# EAGLE board laser (EAGLE 9.3.0)
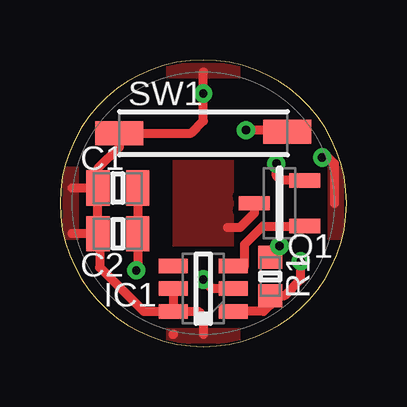
[diagram p0: board, top side]
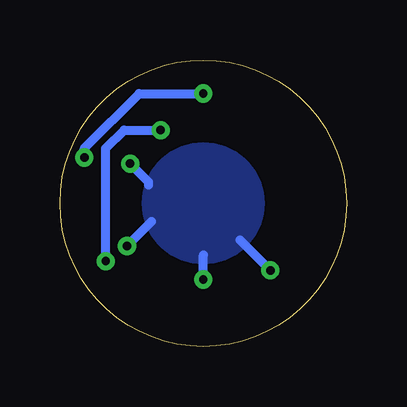
[diagram p1: board, bottom side, seen from below]

Size 11.94 x 11.94 mm. Coordinates in mm from the lower left corner, seen from the top.
Outline: 0,5.97 arc90 5.97,0 arc90 11.94,5.97 arc90 5.97,11.94 arc90 0,5.97
Copper layers (1*16): Top 0.035mm / dielectric 1.5mm / Bottom 0.035mm
Design rules "default": minimum track width 15mil, minimum drill 0.35mm, track to track 10mil, track to pad 10mil, pad to pad 10mil, via to via 10mil, smd to smd 0mil, copper to edge 0mil, drill to drill 6mil, minimum pad ring 10mil, minimum via ring 8mil, stop-mask expansion 4mil, vias tented up to drill 25mil, thermal gap 10mil

## Footprints (pad centres in the part's own frame; a part is rotated, then mirrored left to right if it is on the bottom)
0805 = smd 0.97 x 1.47: 1 -0.83,0; 2 0.83,0
SOT23-6 = smd 1.2 x 0.6: 1 -1.25,0.95; 2 -1.25,0; 3 -1.25,-0.95; 4 1.25,-0.95; 5 1.25,0; 6 1.25,0.95
SOT23-3 = smd 1.3 x 0.6: 1 -1.05,0.95; 2 -1.05,-0.95; 3 1.05,0
0603 = smd 0.95 x 1: 1 -0.8,0; 2 0.8,0
REED-7MM-SMD = smd 2 x 1: P$1 -3.5,0; P$2 3.5,0.05

## Placement (x,y rotation side)
C1  [0805]  2.41,6.6 180 top
C2  [0805]  2.41,4.7 180 top
IC1  [SOT23-6]  5.97,2.41 180 top
Q1  [SOT23-3]  9.14,5.97 180 top
R1  [0603]  8.76,2.92 270 top
SW1  [REED-7MM-SMD]  5.97,8.89 0 top

## Library data of the parts
C1 C2 IC1 Q1 R1 SW1 = SamacSys_Parts

## Nets
GND: C1.1 C2.1 IC1.2 Q1.2 R1.1
N$1: IC1.3 Q1.1
N$2: IC1.1 R1.2 SW1.P$2
N$3: Q1.3
VCC: C1.2 C2.2 IC1.5 IC1.6 SW1.P$1

## Tracks (layer width: path | path; a pad name or v marks a point on that pad's centre or on a via)
GND  (via drill 0.35)
  Top 0.381: v9.14,4.19 8.76,3.81 R1.1 | C1.1 C2.1 3.24,3.24 v3.17,3.17 | Q1.2 9.21,6.92 9.02,7.11 v9.02,7.62 | IC1.2 6.35,2.41 v5.97,2.79
  Bottom 0.381: v3.17,3.17 4.45,4.45 | v5.97,2.79 5.97,3.81 | v9.02,7.62 8.26,6.86 8.26,6.73 | v9.14,4.19 8.13,5.21
  pour Bottom: 3.43,5.97 arc90 5.97,3.43 arc90 8.51,5.97 arc90 5.97,8.51 arc90
N$1
  Top 0.381: IC1.3 7.69,3.36 7.69,4.25 8.46,5.02 Q1.1
N$2  (via drill 0.35)
  Top 0.381: IC1.1 8.49,1.46 8.76,1.74 R1.2 9.36,2.12 10.03,2.79 v10.03,3.56 | SW1.P$2 9.39,9.02 v7.75,9.02
  Bottom 0.381: v10.03,3.56 10.03,8.26 9.27,9.02 v7.75,9.02
N$3
  Top 0.381: Q1.3 8.09,5.55 7.49,4.95 6.99,4.95
  pour Top: 7.24,7.75 4.7,7.75 4.7,4.19 7.24,4.19
VCC  (via drill 0.35)
  Top 0.381: IC1.5 IC1.6 | C2.2 1.65,4.63 1.65,3.3 3.49,1.46 IC1.6 | C2.2 C1.2 | C1.2 1.58,7.42 2.47,8.31 SW1.P$1 5.46,8.89 5.97,9.4 v5.97,10.54 5.97,11.43 | C1.2 0.51,6.6 | C2.2 0.51,4.7 | 4.72,0.53 4.7,0.51 | IC1.6 5.78,1.46 5.97,1.27 5.97,0.51 | v10.92,7.87 11.18,7.87 11.43,7.62 11.43,5.97
  Bottom 0.381: v10.92,7.87 10.92,8.26 8.64,10.54 v5.97,10.54
  pour Top: 5.08,0.13 4.45,0.25 4.45,0.76 7.49,0.76 7.49,0.25 6.86,0.13
  pour Top: 6.86,11.81 7.49,11.68 7.49,11.18 4.45,11.18 4.45,11.68 5.08,11.81
  pour Top: 11.81,5.08 11.68,4.45 11.18,4.45 11.18,7.49 11.68,7.49 11.81,6.86
  pour Top: 0.13,6.86 0.25,7.49 0.76,7.49 0.76,4.45 0.25,4.45 0.13,5.08